# Allegro board sophum_torque_motor_v1.brd
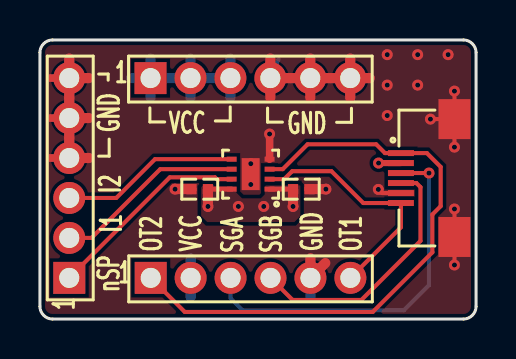
[diagram p0: board, top side]
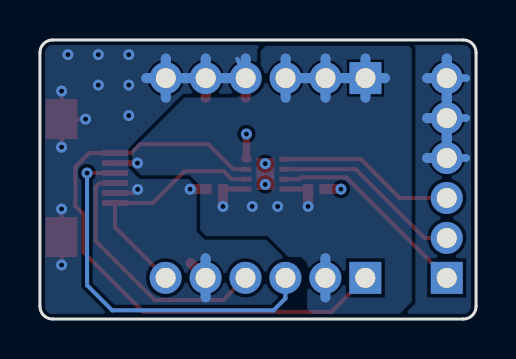
[diagram p1: board, bottom side, seen from below]

Outline 21.84 x 13.97 mm; copper layers: TOP, BOTTOM. Coordinates in mm from the lower left corner of the outline.
Outline path: 0,13.34 0,0.64 arc(0.19,0.19) 0.64,0 21.21,0 arc(21.66,0.19) 21.84,0.64 21.84,13.34 arc(21.66,13.78) 21.21,13.97 0.64,13.97 arc(0.19,13.78) 0,13.34

## Placement (name value [footprint] x y rotation side)
C1  0.1uF  [C0402]  13.09 6.5 0 top
C2  0.1uF  [C0402]  8 6.5 180 top
J1  FPC-6  [FPC-6-0R50]  18.08 7.06 90 top
J2  PWR  [HDR6X1-2R00-TM-VM]  5.54 12.06 0 top
J3  CTR  [HDR6X1-2R00-TM-VM]  1.47 2.06 90 top
J4  OUT  [HDR6X1-2R00-TM-VM]  5.55 2.06 0 top
U1  DRV8837  [WSON-8-0R50X0R25]  10.55 7.25 180 top

## Library data of the parts
C1 C2 = CAPACITOR-NON-POL
J1 = FPC-6
J2-J4 = HEADER-6X1
U1 = DRV8837

## Footprints (pads in the part's own frame, mm; a bottom-side part is the same pattern mirrored in y, then rotated)
C0402
  rect 0.51x0.51 smd: 1(-0.41,0) 2(0.41,0)
FPC-6-0R50
  rect 0.3x1.3 smd: 1(1.25,0) 2(0.75,0) 3(0.25,0) 4(-0.25,0) 5(-0.75,0) 6(-1.25,0)
  rect 2x1.6 smd: 7(-2.95,-2.68) 8(2.95,-2.68)
HDR6X1-2R00-TM-VM
  rect 1.6x1.6 hole 1: 1(0,0)
  round 1.6 hole 1: 2(2,0) 3(4,0) 4(6,0) 5(8,0) 6(10,0)
WSON-8-0R50X0R25
  rect 0.5x0.25 smd: 1(-0.95,0.75) 2(-0.95,0.25) 3(-0.95,-0.25) 4(-0.95,-0.75) 5(0.95,-0.75) 6(0.95,-0.25) 7(0.95,0.25) 8(0.95,0.75)
  rect 0.9x1.6 smd: 9(0,0)

## Nets
GND: C1.2 C2.2 J1.5 J1.7 J1.8 J2.4 J2.5 J2.6 J3.4 J3.5 J3.6 J4.5 U1.4(GND) U1.9(TP)
VCC_3V3: C1.1 C2.1 J1.2 J2.1 J2.2 J2.3 J4.2 U1.1(VM) U1.8(VCC)
ENCODER_A: J1.3 J4.3
ENCODER_B: J1.4 J4.4
IN1: J3.2 U1.6(IN1)
IN2: J3.3 U1.5(IN2)
NSLP: J3.1 U1.7(NSLEEP)
OUT1: J1.6 J4.6 U1.2(OUT1)
OUT2: J1.1 J4.1 U1.3(OUT2)

## Via types
v1: diameter 0.55, hole 0.254, TOP to BOTTOM, 23 vias

## Routing (per net, layer and track width the routed paths; a pad name or vN(x,y) marks a point on that pad's centre or on a via; arc(x,y) is an arc through that point)
GND: length 57
  TOP w0.203: J1.8 v1(19.56,10.01) ; J1.8 v1(20.76,11.41) ; J1.8 v1(20.76,8.61) ; v1(20.76,5.51) J1.7 v1(20.76,2.71) ; J1.5 17.13,6.31 v1(16.95,6.49)
  TOP w0.381: J3.6 0.49,12.06 ; J3.5 0.49,10.06 ; U1.4 v1(11.5,9.26) ; J3.4 0.49,8.06
  TOP w0.508: J2.5 13.54,13.04 ; J2.5 13.54,11.08 ; J2.5 14.52,12.06 ; J2.5 12.57,12.06 ; J2.6 15.54,11.08 ; J2.6 14.57,12.06 ; J2.6 16.52,12.06 ; J2.6 15.54,13.04 ; J3.6 2.45,12.06 ; J3.6 1.47,13.04 ; J3.6 1.47,11.09 ; J2.4 11.54,11.08 ; J2.4 12.52,12.06 ; J2.4 11.54,13.04 ; C2.2 v1(6.77,6.5) ; 13.55,3.04 J4.5 14.29,2.8 ; J3.5 2.45,10.06 ; J3.5 1.47,11.04 ; J3.5 1.47,9.09 ; 2.45,8.06 J3.4 1.47,9.04 ; C1.2 v1(14.32,6.5)
  BOTTOM w0.203: 1.47,9.04 1.47,9.03 ; J2.4 11.96,13.03
  BOTTOM w0.381: J3.6 0.49,12.06 ; J3.4 0.49,8.06 ; J3.5 0.49,10.06
  BOTTOM w0.508: J3.6 1.47,11.09 ; J3.6 1.47,13.04 ; J3.6 2.45,12.06 ; J2.6 15.54,11.08 ; J2.6 16.52,12.06 ; J2.6 15.54,13.04 ; J2.6 14.57,12.06 ; 11.54,13.04 J2.4 12.52,12.06 ; 13.55,3.04 J4.5 13.55,1.08 ; 1.47,9.03 J3.4 2.45,8.06 ; J3.5 1.47,9.09 ; J3.5 2.45,10.06 ; J3.5 1.47,11.04 ; 14.52,12.06 J2.5 ; J2.5 12.57,12.06 ; J2.5 13.54,13.04
  vias: v1(10.56,7.78) v1(10.56,6.73) v1(17.39,13.23) v1(17.39,11.71) v1(17.39,10.19) v1(18.92,13.23) v1(18.92,11.71) v1(20.44,13.23)
VCC_3V3: length 17.9
  TOP w0.254: U1.1 C1.1 ; U1.8 C2.1
  TOP w0.305: J1.2 v1(16.96,7.81)
  TOP w0.508: C2.1 v1(8.41,5.64) ; C1.1 v1(12.68,5.64)
  BOTTOM w0.508: 8.52,12.06 J2.2 ; J2.2 6.57,12.06 ; J2.2 7.54,11.08 ; J2.2 7.54,13.04 ; J2.1 5.54,11.08 ; J2.1 6.52,12.06 ; J2.1 5.54,13.04 ; J2.1 4.56,12.06 ; J2.3 9.54,11.08 ; J2.3 8.57,12.06 ; J2.3 9.54,13.04 ; 7.55,3.04 J4.2 7.55,1.08
  vias: v1(9.94,5.64) v1(11.21,5.64)
ENCODER_A: length 18.8
  TOP w0.203: J1.3 v1(19.49,7.31)
  BOTTOM w0.203: J4.3 9.55,1.03 10.15,0.44 18.23,0.44 19.49,1.69 v1(19.49,7.31)
ENCODER_B: length 12.9
  TOP w0.203: J4.4 12.65,0.96 16.1,0.96 19.06,3.91 19.06,6.6 18.86,6.81 18.08,6.81 J1.4
IN1: length 9.6
  TOP w0.203: J3.2 2.58,4.06 6.03,7.5 U1.6
IN2: length 8.9
  TOP w0.203: U1.5 5.76,8 3.82,6.06 J3.3
NSLP: length 10.3
  TOP w0.203: U1.7 8.86,7 8.77,7.09 6.5,7.09 J3.1
OUT1: length 12.2
  TOP w0.203: U1.2 12.24,7 12.63,7.4 14.6,7.4 16.19,5.81 J1.6 18.08,4.59 J4.6
OUT2: length 30
  TOP w0.203: J4.1 7.25,0.36 16.67,0.36 19.66,3.34 19.66,5.23 20.07,5.65 20.07,7.62 19.38,8.31 J1.1 17.28,8.31 16.84,8.75 13.41,8.75 12.16,7.5 U1.3

## Copper pours and planes (outline as drawn; the poured copper is in the pictures)
GND on TOP: 0.64,0.26 0.37,0.37 0.26,0.64 0.26,13.34 0.37,13.6 0.64,13.71 21.21,13.71 21.48,13.6 21.59,13.34 21.59,0.64 21.48,0.37 21.21,0.26 ; 5 cut-outs
GND on BOTTOM: 0.64,0.26 0.37,0.37 0.26,0.64 0.26,13.34 0.37,13.6 0.64,13.71 21.21,13.71 21.48,13.6 21.59,13.34 21.59,0.64 21.48,0.37 21.21,0.26 ; 1 cut-out
VCC_3V3 on TOP: 8.24,6.76 8.64,6.76 8.77,6.63 9.83,6.63 9.83,6.34 10.12,6.04 11.07,6.04 11.26,6.24 11.26,6.64 11.32,6.69 13.02,6.69 13.04,6.67 13.04,5.16 12.74,4.85 8.38,4.85 8.07,5.16 8.07,6.59
VCC_3V3 on BOTTOM: 10.79,12.28 11.98,11.09 14.6,11.09 17.23,8.46 17.23,7.65 16.77,7.19 14.33,7.19 13.82,6.68 13.82,4.45 13.52,4.15 10.44,4.15 9.4,3.11 8.77,3.11 8.46,2.8 8.46,0.5 8.22,0.26 3.82,0.26 3.22,0.86 3.22,13.53 3.36,13.67 10.54,13.67 10.79,13.42

## Text on the board
Ref Des/Silkscreen Top: VCC | GND | nSP | I2 | I1 | OT2 | SGA | SGB | OT1
NCLEGEND-1-2: FIGURE | SIZE | 10.0 | 39.37 | DRILL CHART: TOP to BOTTOM | ALL UNITS ARE IN MILS | PLATED | QTY | 23 | 18
